# Altium PCB Universal_Driver v2.PcbDoc
Units mm, origin at the board's own origin, x right, y up, seen from the top; angles counter-clockwise.
Board outline 46.4 x 44.85 mm, 4 copper layers (Top Layer, Layer 2, Layer 3, Bottom Layer), stack 1.369 mm thick; 39 components, 42 nets, 175 pads, 29 vias.
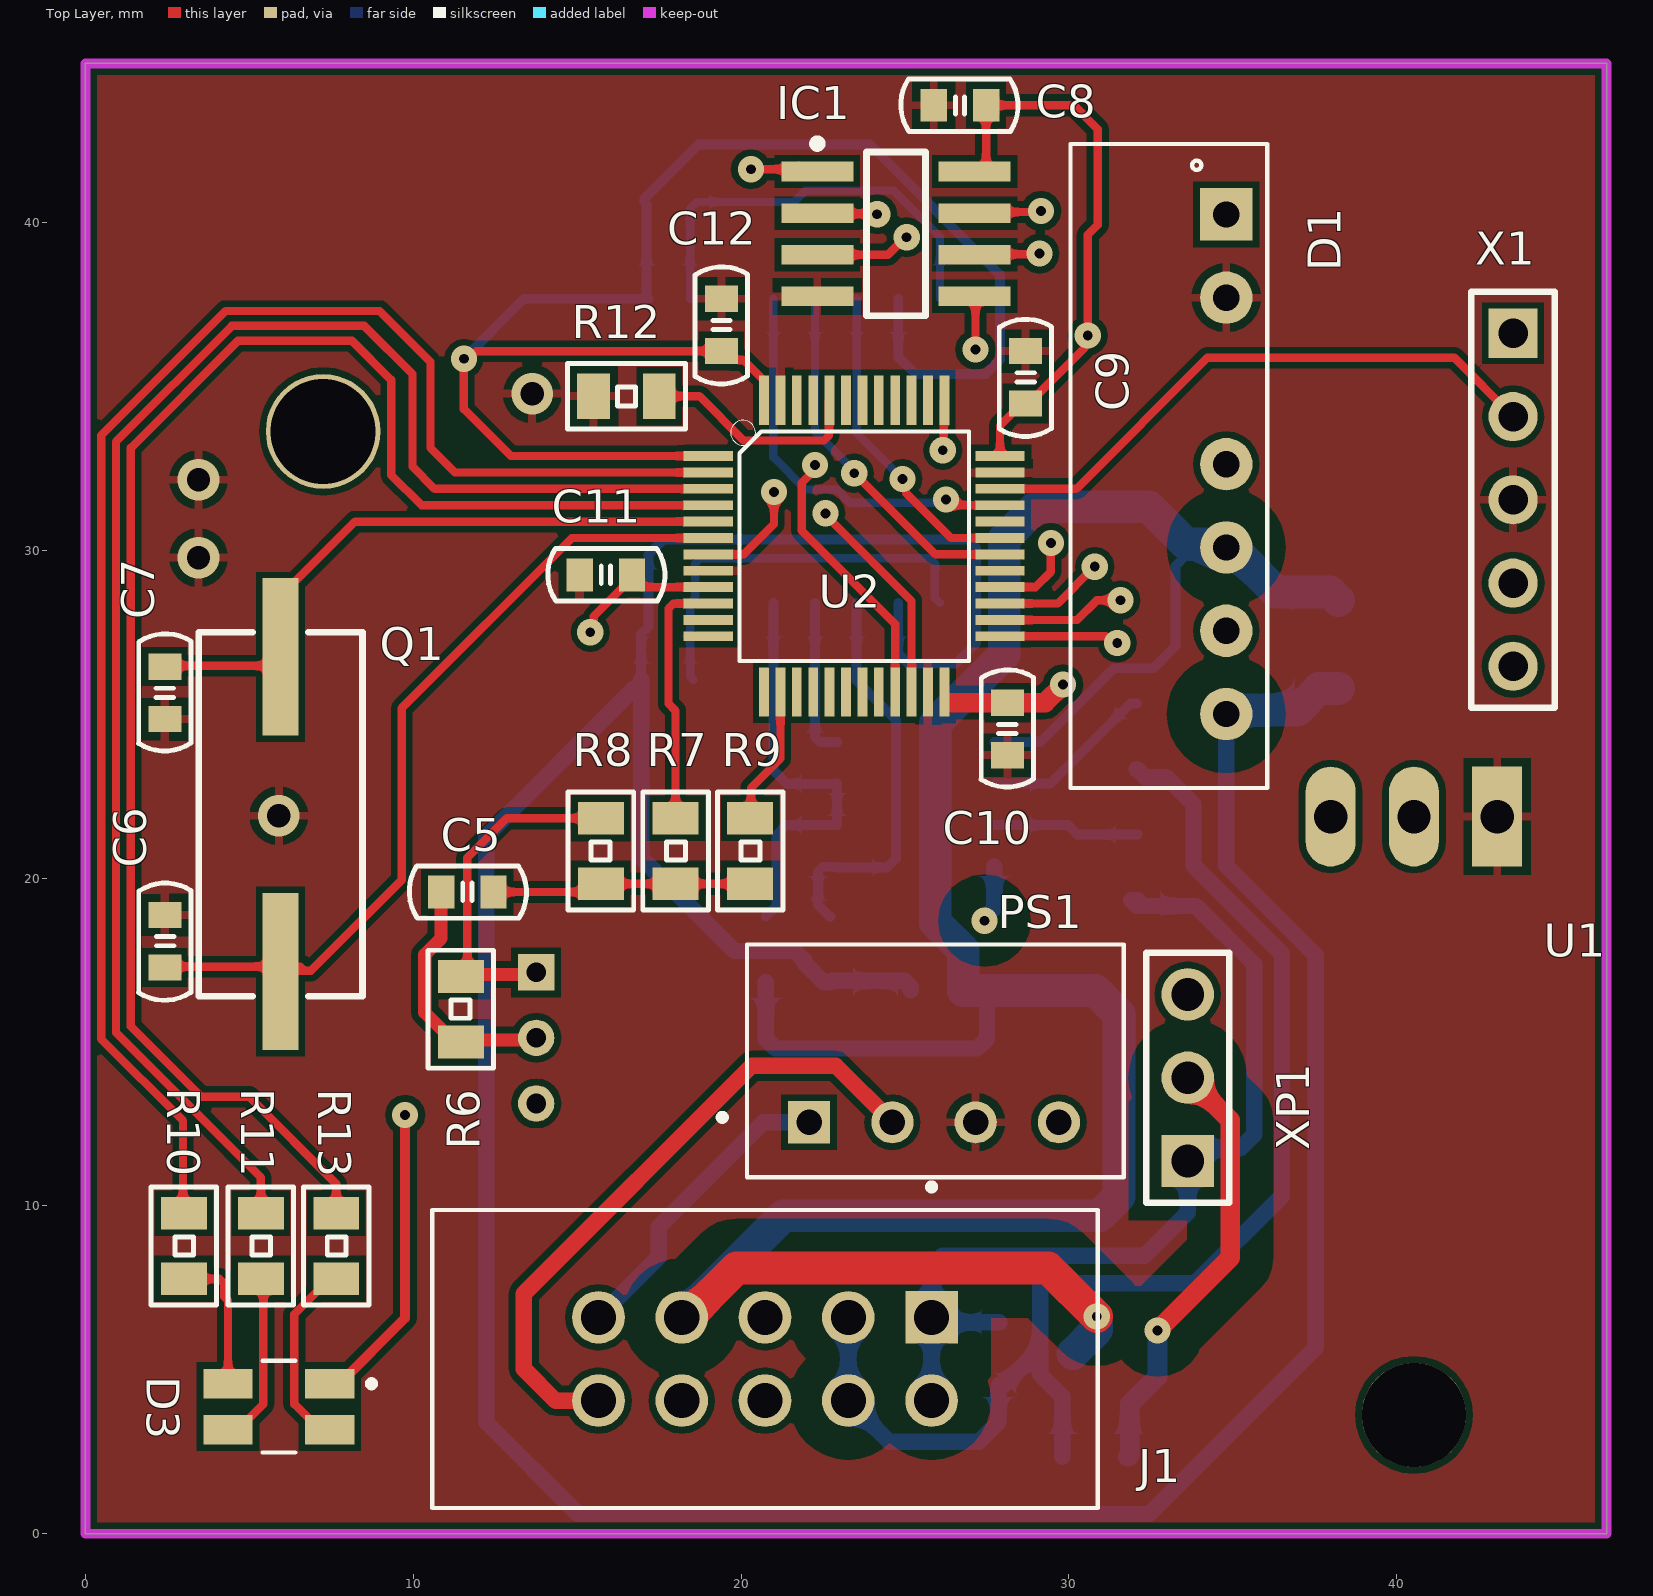
[diagram p0: Top Layer view]
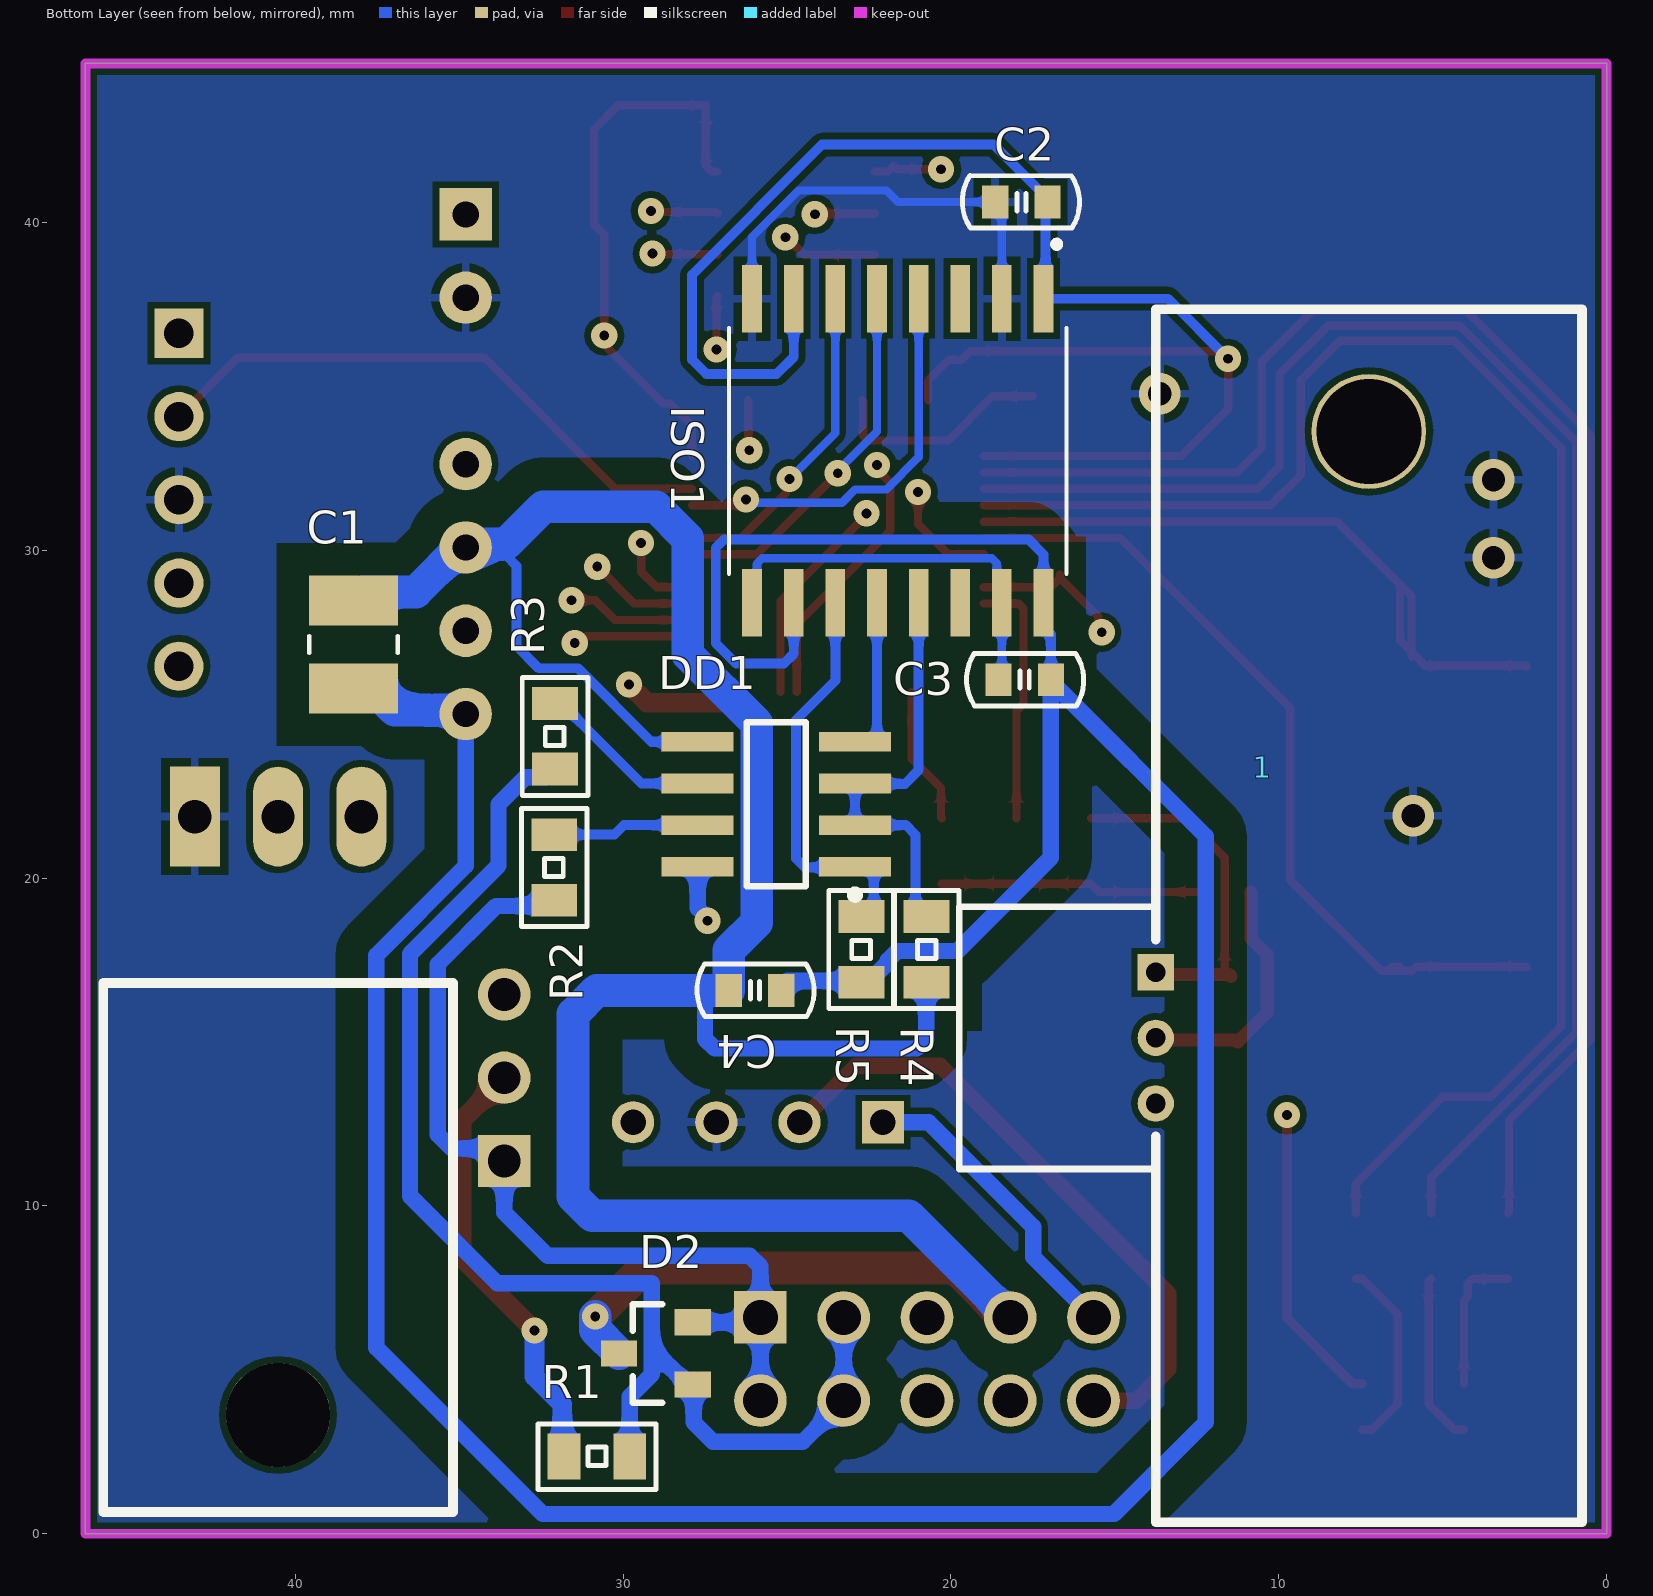
[diagram p1: Bottom Layer view, seen from below]
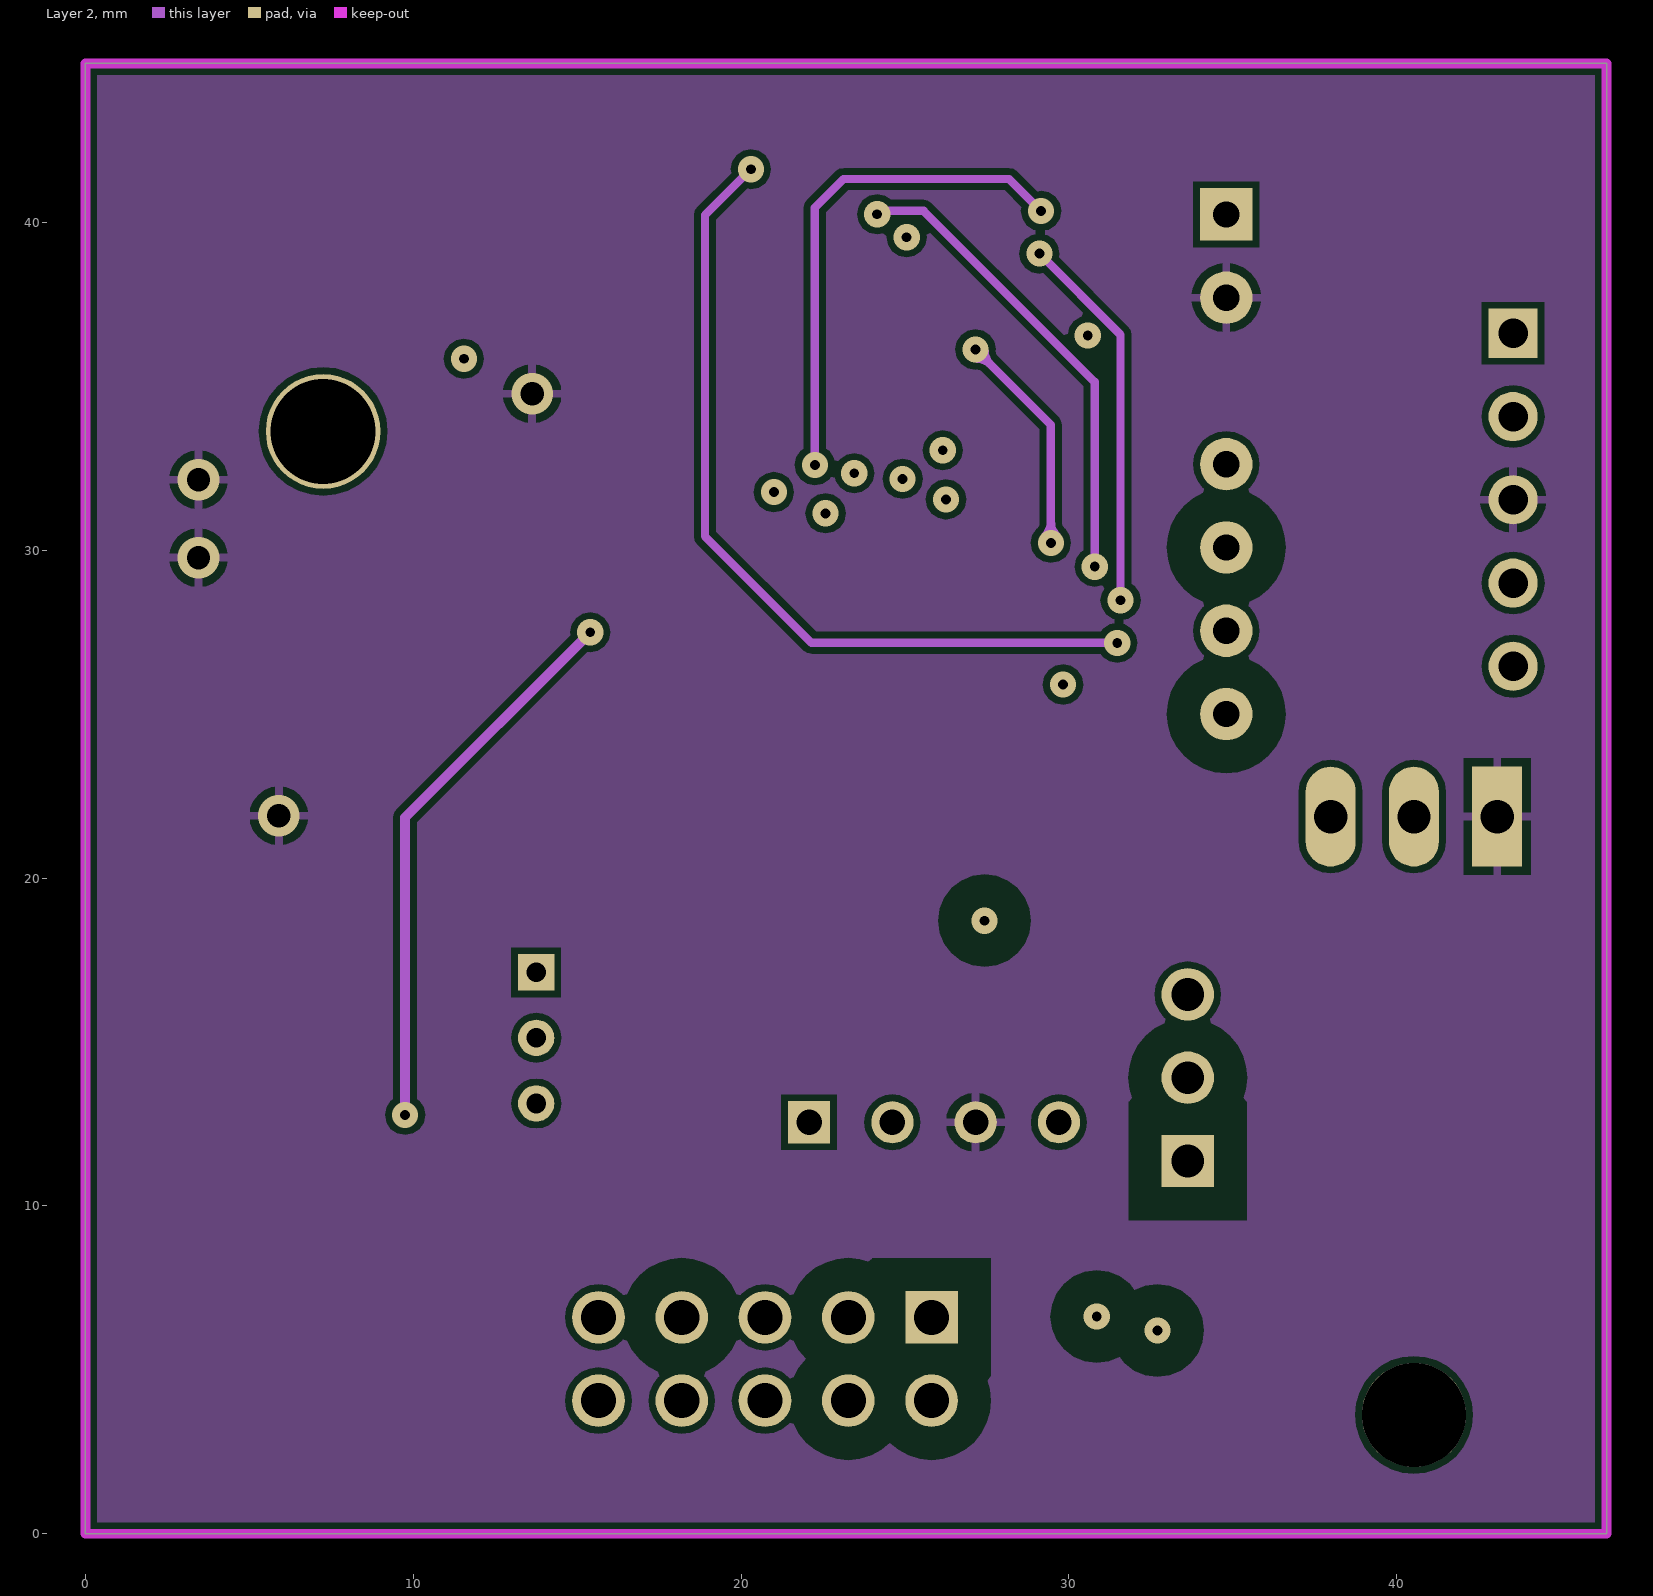
[diagram p2: Layer 2]
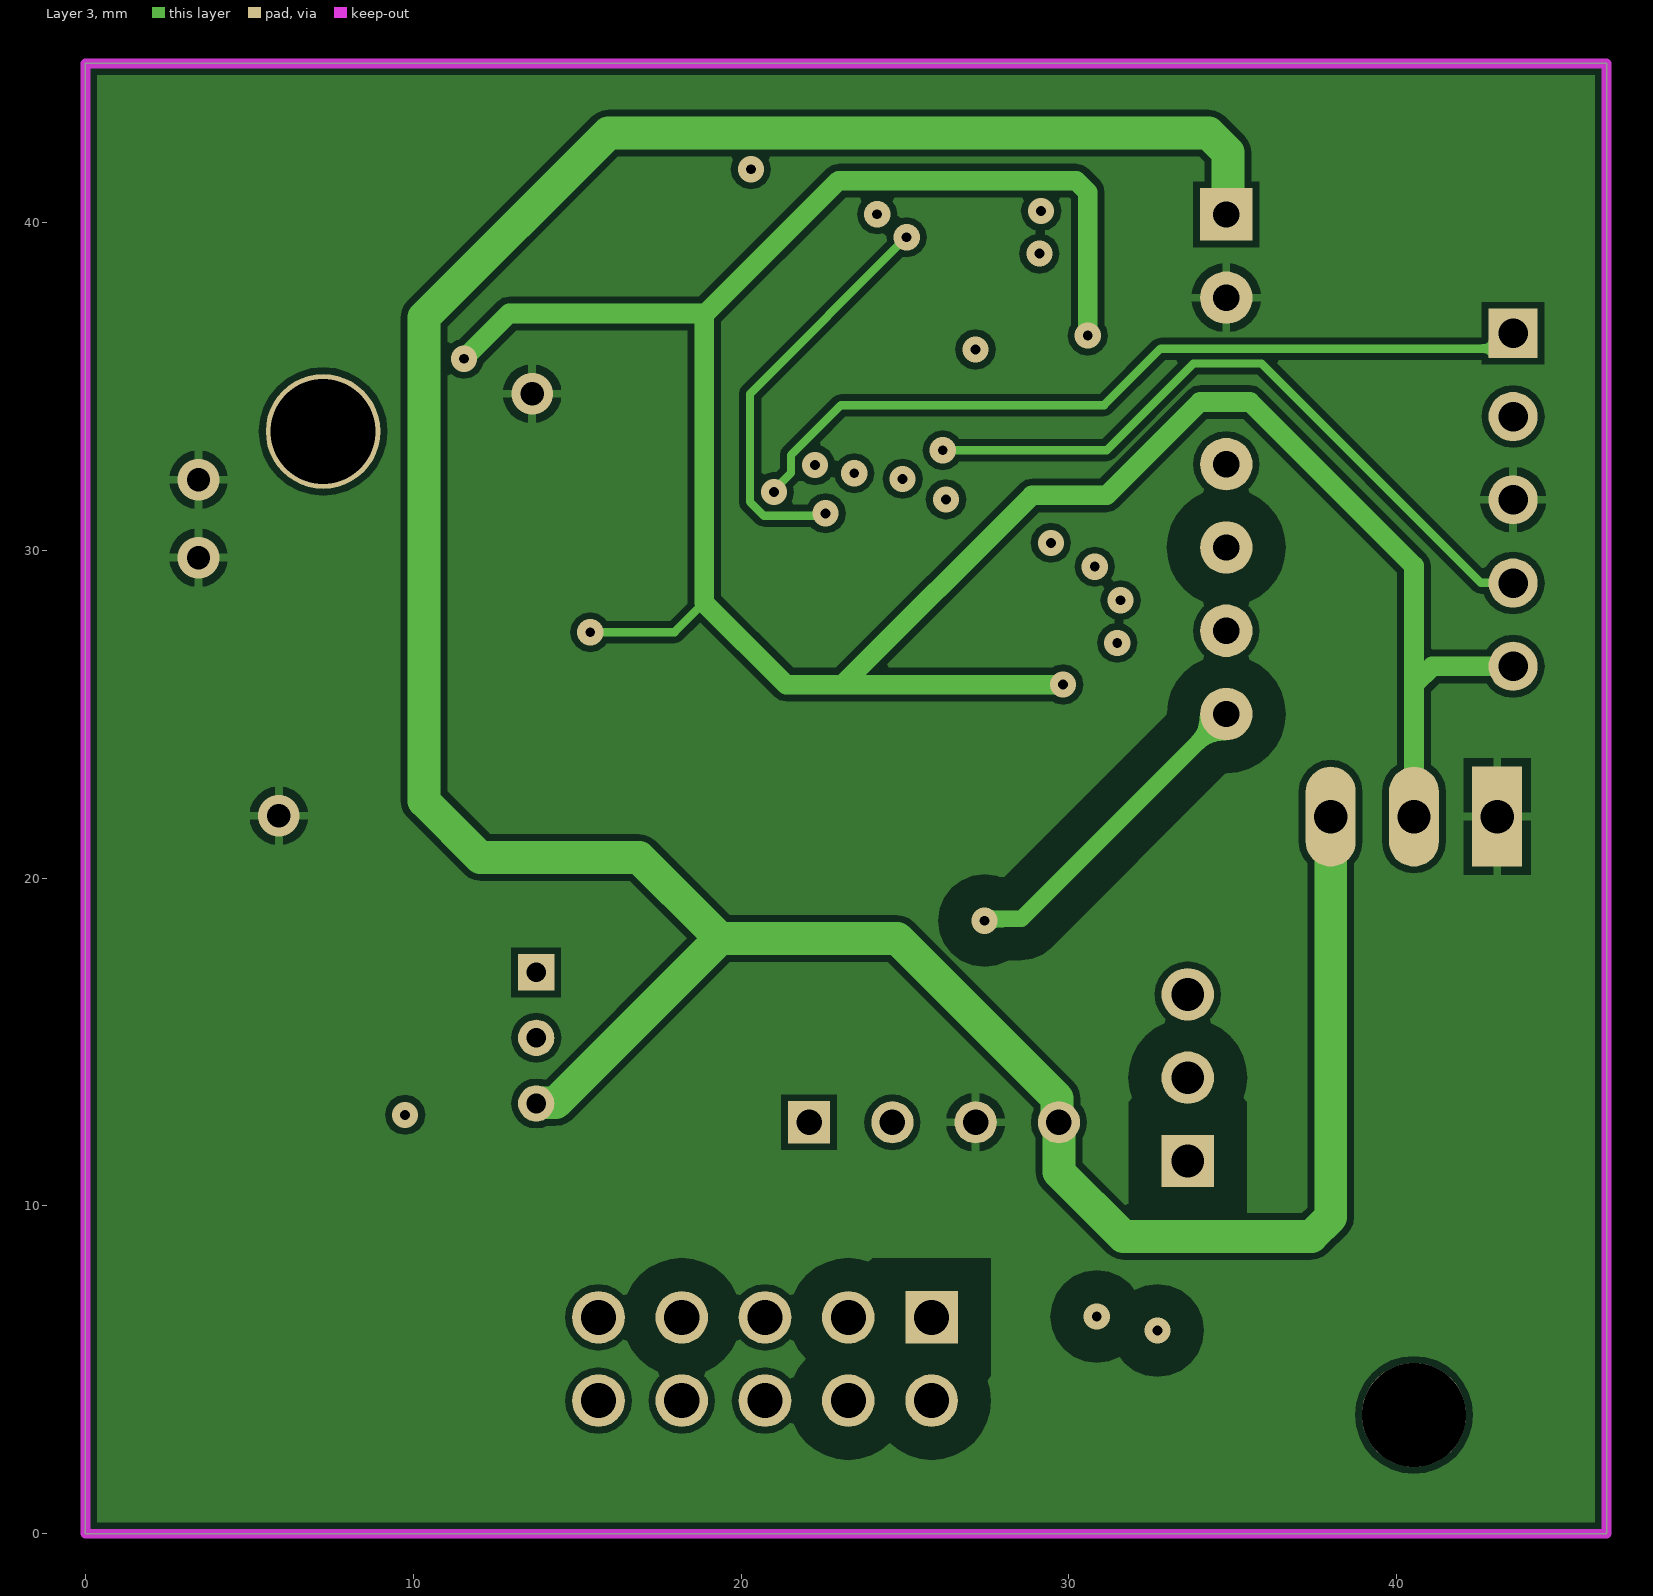
[diagram p3: Layer 3]

## Layer stack, top to bottom
Top Solder: solder mask 0.0254, SM-001, Dk 4
Top Layer: signal copper 0.035
Dielectric 1: prepreg 0.1295, PP-017, Dk 4.3
Dielectric 2: prepreg 0.1295, PP-017, Dk 4.3
Layer 2: signal copper 0.035
Dielectric 3: core 0.7112, Core-039, Dk 4.8
Layer 3: signal copper 0.035
Dielectric 4: prepreg 0.1295, PP-017, Dk 4.3
Dielectric 5: prepreg 0.1295, PP-017, Dk 4.3
Bottom Layer: signal copper 0.035
Bottom Solder: solder mask 0.0254, SM-001, Dk 4

## Board outline
0,0 0,44.85 46.4,44.85 46.4,0

## Design rules (kind name [scope] priority, off if disabled: settings)
Clearance Clearance_1 [InNetClass('ISO') vs InNet('GND')] p1: gap=1 ignorepadtopadclearanceinfootprint=FALSE
Clearance [All] p2: gap=0.2 ignorepadtopadclearanceinfootprint=FALSE
ComponentClearance [All] p1: gap=0.01 collisioncheckmode=3 verticalgap=0.01 showdistances=FALSE
DiffPairsRouting [All] p1: maxlimit=0.254 minlimit=0.2 mostfreqgap=0.254 toplayer_minwidth=0.25 toplayer_maxwidth=0.381 toplayer_prefwidth=0.381 midlayer1_minwidth=0.25 midlayer1_maxwidth=0.381 midlayer1_prefwidth=0.381 midlayer2_minwidth=0.25 midlayer2_maxwidth=0.381 midlayer2_prefwidth=0.381 bottomlayer_minwidth=0.25 bottomlayer_maxwidth=0.381 bottomlayer_prefwidth=0.381 maxuncoupledlength=12.7
HoleSize [All] p1: absolutevalues=TRUE maxlimit=5 minlimit=0.025 maxpercent=80.000 minpercent=20.000
MinimumSolderMaskSliver [All] p1: minsoldermaskwidth=0
PolygonConnect [All] p1: connectstyle=Relief reliefconductorwidth=0.254 reliefentries=4 polygonreliefangle="90 Angle" airgapwidth=0.254
RoutingVias [All] p1: holewidth=0.3 width=1 viastyle="Through Hole" minholewidth=0.3 minwidth=0 maxholewidth=1 maxwidth=4
SilkToSolderMaskClearance [IsPad] p1: minsilkscreentomaskgap=0.1 clearancetoexposedcopper=TRUE
SolderMaskExpansion [All] p1: expansion=0.102 istentingtop=FALSE
UnRoutedNet [All] p1: checkbadconnections=TRUE
Width [All] p1: maxlimit=4 minlimit=0.254 preferedwidth=0.254
24 further rules are at their usual default settings.

## Classes and differential pairs
net class ISO: 485_A 485_B +5v_ISO GND_ISO NetC3_1 NetDD1_1 NetDD1_2 NetDD1_4 NetDD1_6 NetDD1_7 NetISO1_14 NetR1_1 NetXP1_3

## Components (designator, comment, footprint, x,y, rotation, side; value= is the part's Value field where it differs from the comment)
1 "S3B-PH-K-S" S3B-PH-K-S 13.75,15.125 r270 bottom
C1 "10uF" CAPC3225X270N 38.225,27.125 r270 bottom
C2 "0.1uF" "CAPACITOR 0603" 17.05,40.625 r0 bottom
C3 "0.1uF" "CAPACITOR 0603" 18.55,26.05 r180 bottom
C4 "0.1uF" "CAPACITOR 0603" 26.775,16.575 r180 bottom
C5 "0.1uF" "CAPACITOR 0603" 10.85,19.575 r0 top
C6 "20pF" "CAPACITOR 0603" 2.425,18.875 r270 top
C7 "20pF" "CAPACITOR 0603" 2.425,24.85 r90 top
C8 "0.1uF" "CAPACITOR 0603" 27.475,43.575 r180 top
C9 "0.1uF" "CAPACITOR 0603" 28.675,36.075 r270 top
C10 "0.1uF" "CAPACITOR 0603" 28.125,23.75 r90 top
C11 "0.1uF" "CAPACITOR 0603" 15.075,29.25 r0 top
C12 "0.1uF" "CAPACITOR 0603" 19.4,37.675 r270 top
D1 "AM1DS-0505SJZ" AM2D-NZ 34.8,40.245 r270 top
D2 "SM712" SOT23 29,5.5 r0 bottom
D3 "150141M173100" LED_150141M173100 5.9,3.875 r0 top
DD1 "MAX485" NSO8 25.325,22.25 r0 bottom
IC1 "GD25Q16CTIGR" NSO8 24.725,39.65 r0 top
ISO1 "D?" *SOIC127P1030X265-16N 21.62,33.035 r270 bottom
J1 "DS1013-10SSIB1" CONNFLY_DS1013-10SSIB1 20.73,5.33 r180 top
PS1 "TME_2405S" CONV_TME_2405S 25.925,14.425 r0 top
Q1 "12MHz" HC49SM 5.95,21.95 r90 top
R1 "120" "Resistor 0805" 31.8,2.35 r180 bottom
R2 "10" "Resistor 0805" 32.1,19.325 r90 bottom
R3 "10" "Resistor 0805" 32.075,23.325 r90 bottom
R4 "10K" "Resistor 0805" 20.75,18.825 r270 bottom
R5 "10K" "Resistor 0805" 22.725,16.825 r90 bottom
R6 "10K" "Resistor 0805" 11.45,15 r90 top
R7 "10" "Resistor 0805" 18,21.825 r270 top
R8 "10K" "Resistor 0805" 15.725,19.825 r90 top
R9 "10" "Resistor 0805" 20.275,21.825 r270 top
R10 "3.9k" "Resistor 0805" 3,9.775 r270 top
R11 "3.9k" "Resistor 0805" 5.35,9.775 r270 top
R12 "510" "Resistor 0805" 17.5,34.7 r180 top
R13 "3.9k" "Resistor 0805" 7.65,9.775 r270 top
U1 "LM1117T-3.3" TO-220-KCS0003B 40.525,21.875 r180 top
U2 "STM32F303CBT7" LQFP48 23.45,30.125 r0 top
X1 "PLS-5" PLS-5-3D 43.55,36.62 r270 top
XP1 "PLS-3" ZL201-3 33.625,13.91 r90 top

## Footprints (in the part's own frame and the unit in brackets; to place one, negate y for a bottom-side part, rotate by r counter-clockwise, add the part's x,y. Pads: shape width x height; smd on the part's side, far side on the other; paste and mask are expansions set on the pad)
*SOIC127P1030X265-16N [mm]
  rect 2.06x0.6 smd: 1(-4.64,4.445) 2(-4.64,3.175) 3(-4.64,1.905) 4(-4.64,0.635) 5(-4.64,-0.635) 6(-4.64,-1.905) 7(-4.64,-3.175) 8(-4.64,-4.445) 9(4.64,-4.445) 10(4.64,-3.175) 11(4.64,-1.905) 12(4.64,-0.635) 13(4.64,0.635) 14(4.64,1.905) 15(4.64,3.175) 16(4.64,4.445)
  silkscreen extent -6.4,-5.15 3.75,5.15
AM2D-NZ [mm]
  rect 1.6x1.6 hole 0.8: 1(0,0)
  round 1.6 hole 0.8: 2(2.54,0) 4(7.62,0) 5(10.16,0) 6(12.7,0) 7(15.24,0)
  silkscreen extent -2.15,-4.75 17.5,1.25
"CAPACITOR 0603" [mm]
  rect 0.8x1 smd: 1(0,0) 2(1.6,0)
  silkscreen extent -0.97,-0.8 2.6,0.8, body extent -0.01,-0.38 1.64,0.42, height 0.81
CAPC3225X270N [mm]
  rect 1.53x2.72 smd: 1(-1.341,0) 2(1.341,0)
  silkscreen extent -0.26,-1.35 0.26,1.35
CONNFLY_DS1013-10SSIB1 [mm]
  rect 1.605x1.605 hole 1.07: 1(-5.08,-1.27)
  round 1.605 hole 1.07: 2(-5.08,1.27) 3(-2.54,-1.27) 4(-2.54,1.27) 5(0,-1.27) 6(0,1.27) 7(2.54,-1.27) 8(2.54,1.27) 9(5.08,-1.27) 10(5.08,1.27)
  silkscreen extent -10.15,-5.35 10.15,4.55
CONV_TME_2405S [mm]
  rect 1.288x1.288 hole 0.78: 1(-3.85,-1.875)
  round 1.288 hole 0.78: 2(-1.31,-1.875) 3(1.23,-1.875) 4(3.77,-1.875)
  silkscreen extent -6.6,-3.55 5.75,3.55, body extent -5.83,-3.51 5.57,2.49, height 10
HC49SM [mm] "Quartz crystal resonator"
  rect 4.8x1.1 smd mask+0.06: 1(-4.8,0) 2(4.8,0)
  silkscreen extent -5.55,-2.5 5.55,2.5, body extent -6.7,-2.45 6.7,2.45, height 5.09
LED_150141M173100 [mm]
  rect 1.5x0.9 smd: 1(1.55,0.7) 2(1.55,-0.7) 3(-1.55,0.7) 4(-1.55,-0.7)
  silkscreen extent -0.5,-1.4 2.93,1.4
LQFP48 [mm]
  rect 1.5x0.3 smd: 1(-4.45,2.75) 2(-4.45,2.25) 3(-4.45,1.75) 4(-4.45,1.25) 5(-4.45,0.75) 6(-4.45,0.25) 7(-4.45,-0.25) 8(-4.45,-0.75) 9(-4.45,-1.25) 10(-4.45,-1.75) 11(-4.45,-2.25) 12(-4.45,-2.75) 25(4.45,-2.75) 26(4.45,-2.25) 27(4.45,-1.75) 28(4.45,-1.25) 29(4.45,-0.75) 30(4.45,-0.25) 31(4.45,0.25) 32(4.45,0.75) 33(4.45,1.25) 34(4.45,1.75) 35(4.45,2.25) 36(4.45,2.75)
  rect 0.3x1.5 smd: 13(-2.75,-4.45) 14(-2.25,-4.45) 15(-1.75,-4.45) 16(-1.25,-4.45) 17(-0.75,-4.45) 18(-0.25,-4.45) 19(0.25,-4.45) 20(0.75,-4.45) 21(1.25,-4.45) 22(1.75,-4.45) 23(2.25,-4.45) 24(2.75,-4.45) 37(2.75,4.45) 38(2.25,4.45) 39(1.75,4.45) 40(1.25,4.45) 41(0.75,4.45) 42(0.25,4.45) 43(-0.25,4.45) 44(-0.75,4.45) 45(-1.25,4.45) 46(-1.75,4.45) 47(-2.25,4.45) 48(-2.75,4.45)
  silkscreen extent -3.77,-3.5 3.5,3.84
NSO8 [mm] "SOIC, 8-Leads, Body 4.9x3.9mm, Pitch 1.27mm"
  rect 2.2x0.6 smd mask+0.06: 1(-2.4,1.905) 2(-2.4,0.635) 3(-2.4,-0.635) 4(-2.4,-1.905) 5(2.4,-1.905) 6(2.4,-0.635) 7(2.4,0.635) 8(2.4,1.905)
  silkscreen extent -2.52,-2.5 0.9,2.88, body extent -3,-2.45 3,2.45, height 1.7
PLS-5-3D [mm] "Connector; Header; 5 Position"
  rect 1.5x1.5 hole 0.9: 1(0,0)
  round 1.5 hole 0.9: 2(2.54,0) 3(5.08,0) 4(7.62,0) 5(10.16,0)
  silkscreen extent -1.27,-1.27 11.43,1.27, body extent -1.27,-1.27 11.43,1.27, height 8.44
"Resistor 0805" [mm]
  rect 1x1.4 smd: 1(0,0) 2(2,0)
  silkscreen extent -0.8,-1 2.8,1, body extent -0.03,-0.65 2.02,0.65, height 0.41
S3B-PH-K-S [mm]
  rect 1.108x1.108 hole 0.6: 1(-2,0)
  round 1.108 hole 0.6: 2(0,0) 3(2,0)
  round 3.5 hole 3.2: ""(-18.5,6.5)
  silkscreen extent -22.23,-6 14.77,13, body extent -22.23,-6.22 22.27,13.08, height 21.7
SOT23 [mm] "SOT23, 3-Leads, Body 2.9x1.3mm, Pitch 0.95mm"
  rect 1.1x0.8 smd mask+0.06: 1(-1.125,0.95) 2(-1.125,-0.95) 3(1.125,0)
  silkscreen extent -0.2,-1.5 0.7,1.5, body extent -1.32,-1.5 1.32,1.5, height 1.08
TO-220-KCS0003B [mil]
  rect 60x120 hole 40: 1(-100,0)
  oval 60x120 hole 40: 2(0,0) 3(100,0)
  round 125 hole 125 unplated: ""(0,718.5)
  body extent -190,-97 200,827
ZL201-3 [mm] "Connector; PLS-3; pitch 2.54"
  rect 1.6x1.6 hole 1 mask+0.06: 1(-2.54,0)
  round 1.6 hole 1 mask+0.06: 2(0,0) 3(2.54,0)
  silkscreen extent -3.81,-1.27 3.81,1.27, body extent -3.81,-1.27 3.81,1.27, height 8.44

## Part data
1: "Connector Header Through Hole, Right Angle 3 position 0.079 (2.00mm)", Package=None, Availability=Bad, Check_prices=https://www.snapeda.com/parts/S3B-PH-K-S/JST%20Sales%20America%20Inc./view-part/618944/?ref=eda, MF="JST Sales", MP=S3B-PH-K-S, Price=None, SnapEDA_Link=https://www.snapeda.com/parts/S3B-PH-K-S/JST%20Sales%20America%20Inc./view-part/618944/?ref=snap
C1 C2 C3 C4 C5 C6 C7 C8 C9 C10 C11 C12: library part Capasitor
D2: "Asymmetrical TVS Diode for Extended Common-Mode RS-485"
D3: "Red, Green, Blue _RGB_ 625nm Red, 520nm Green, 470nm Blue LED Indication - Discrete 2V Red, 3.2V Green, 3.2V Blue 1411 _3528 Metric_", Package="1411 WÃ¼rth Elektronik", Availability=Unavailable, MF="Wurth Electronics", MP=150141M173100, Price=None, SnapEDA_Link=https://www.snapeda.com/parts/150141M173100/Wurth%20Electronics%20Inc./view-part/281733/?ref=snap
DD1: "Low-Power, Slew-Rate-Limited RS-485/RS-422 Transceiver", ComponentLink1URL=http://pdfserv.maxim-ic.com/en/ds/MAX1487-MAX491.pdf, Type=MAX485
IC1: library part W25Q128FVEIG, "128M-bit Serial Flash Memory with uniform 4KB sectors and Dual/Quad SPI and QPI"
ISO1: library part ISO7341
J1: "Socket; IDC; male; PIN: 10; straight; THT; gold plated; 2.54mm", Package=None, Availability=Unavailable, BuyPart=https://www.snapeda.com/parts/DS1013-10SSIB1/Connfly/view-part/951223/?ref=eda, MF=Connfly, MP=DS1013-10SSIB1, Price=None, SnapEDA_Link=https://www.snapeda.com/parts/DS1013-10SSIB1/Connfly/view-part/951223/?ref=snap
PS1: "1 Watt DC/DC converter, industrial, 10% input, unregulated, encapsulated, SIP-4 package", Package="SIP-4 Traco Power", Availability="In Stock", Check_prices=https://www.snapeda.com/parts/TME%202405S/Traco%20Power/view-part/488335/?ref=eda, MF="Traco Power", MP="TME 2405S", Price=None, SnapEDA_Link=https://www.snapeda.com/parts/TME%202405S/Traco%20Power/view-part/488335/?ref=snap
Q1: library part "Quartz Crystal", "Quartz Crystal"
R1 R2 R3 R4 R5 R6 R7 R8 R9 R10 R11 R12 R13: library part Resistor
U1: "Linear Voltage Regulator IC 1 Output 800mA TO-220-3", Package="TO-220 Texas Instruments", Availability=Unavailable, MF="Texas Instruments", MP=LM1117T-3.3, Price=None, SnapEDA_Link=https://www.snapeda.com/parts/LM1117T-3.3/Texas%20Instruments/view-part/103788/?ref=snap
U2: "ARMÂ® CortexÂ®-M4 STM32F3 Microcontroller IC 32-Bit 72MHz 128KB _128K x 8_ FLASH 48-LQFP _7x7_", Package="LQFP-48 STMicroelectronics", Availability=Unavailable, MF=STMicroelectronics, MP=STM32F303CBT7, Price=None, SnapEDA_Link=https://www.snapeda.com/parts/STM32F303CBT7/STMicroelectronics/view-part/560080/?ref=snap
X1: "Header, 5-Pin", LatestRevisionDate=17-Jul-2002, LatestRevisionNote="Re-released for DXP Platform.", Publisher="Altium Limited"
XP1: library part "Select jump", "Connector, 3-Pin", Class="Электронные компоненты", Installation=DIP, Ordering_Information={Ordering_Information}, Pins=3, Pitch_mm={Pitch_mm}, SubClass=Разъемы, Type_of_connector={Type_of_connector}

## Via types
v1: diameter 0.8, hole 0.3, Top Layer to Bottom Layer, tented both sides, 25 vias
v2: diameter 1.27, hole 0.711, Top Layer to Bottom Layer, tented both sides, 4 vias

## Nets (pads, with @x,y where several pads share a name; then routed paths per layer and width w, separated by ;. In a path a pad name is that pad's centre, name@x,y a point inside that pad or via, vN(x,y) a via of type N, cw(c..) or ccw(c..) an arc to the next point about the centre after c; other vN are vias at no path point)
485_A: D2.1 J1.3 J1.4 R1.2 R3.1 | length 39.9
  Bottom Layer w0.5: J1.3 J1.4 24.522,2.808 27.258,2.808 27.85,3.4 27.85,4.4 27.875,4.425 D2.1 ; D2.1@28.025,4.55 29.125,5.65 ; R1.2 29.8,4.185 29.125,4.86 29.125,5.65 ; R3.1 32.325,23.075 32.975,23.075 33.8,22.25 33.8,20.385 36.5,17.685 36.5,10.3 33.842,7.642 29.125,7.642 29.125,5.65
485_B: D2.2 J1.1 J1.2 R2.1 XP1.1 | length 28.6
  Bottom Layer w0.5: J1.2 J1.1 ; D2.2 25.96,6.45 J1.1 ; R2.1 31.9,19.325 32.075,19.15 33.875,19.15 35.65,17.375 35.65,12.175 35.225,11.75 34.005,11.75 XP1.1 33.625,9.8 32.3,8.475 26.133,8.475 25.81,8.152 J1.1
+3.3v: C2.1 C8.1 C9.2 C10.2 C11.2 C12.2 D3.1 IC1.8 ISO1.1 ISO1.7 U1.2 U2.1 U2.9 U2.24 U2.36 U2.48 X1.5 | length 186.9
  Top Layer w0.254: v1(11.544,35.844) 11.544,34.306 12.975,32.875 U2.1 ; v1@11.617,35.77 11.923,36.075 C12.2 19.673,35.802 20.073,35.802 20.7,35.175 U2.48 ; v1(15.4,27.5) 15.504,27.604 15.504,27.979 C11.2@16.675,29.15 ; C11.2 C11.2@16.675,29.15 ; U2.9 16.95,28.875 C11.2@16.675,29.15 ; IC1.8 27.302,41.555 27.475,41.728 C8.1 30.15,43.575 30.875,42.85 30.875,39.924 30.573,39.622 v1(30.573,36.548) 30.469,36.444 30.469,36.169 28.775,34.475 C9.2 28.575,34.475 27.9,33.8 U2.36
  Top Layer w0.3: D3.1 7.75,4.575 9.75,6.575 v1(9.75,12.775)
  Top Layer w0.6: 26.35,25.35 C10.2 29.275,25.35 29.82,25.895 v1(29.82,25.905)
  Layer 2 w0.3: v1(9.75,12.775) 9.75,21.85 v1(15.4,27.5)
  Layer 3 w0.254: v1(15.4,27.5) 17.975,27.5 18.875,28.4
  Layer 3 w0.6: v1(11.544,35.844) 12.925,37.225 18.925,37.225 ; v1(29.82,25.905) 29.814,25.9 23.1,25.9 ; v1(30.573,36.548) 30.573,40.924 30.222,41.275 22.975,41.275 18.875,37.175 18.875,28.4 21.375,25.9 23.1,25.9 ; U1.2 40.525,25.9 ; X1.5 41.085,26.46 40.525,25.9 ; 23.1,25.9 28.875,31.675 31.15,31.675 34,34.525 35.525,34.525 40.525,29.525 40.525,25.9
  Bottom Layer w0.3: v1(11.544,35.844) 13.375,37.675 ISO1.1 17.113,37.737 17.113,40.562 C2.1 17.05,40.725 18.7,42.375 23.928,42.375 27.9,38.403 27.9,35.814 27.461,35.375 25.318,35.375 24.795,35.898 ISO1.7
+5v: 1.3 D1.1 PS1.4 U1.3 | length 98.4
  Layer 3 w1: 1.3 13.771,13.146 14.346,13.146 19.36,18.16 ; D1.1 34.8,40.495 34.85,40.545 34.85,42.139 34.264,42.725 15.944,42.725 10.325,37.106 10.325,22.35 12.05,20.625 16.895,20.625 19.073,18.447 19.36,18.16 ; U1.3 37.985,9.656 37.399,9.07 31.655,9.07 29.695,11.03 PS1.4 29.64,12.605 29.64,13.285 24.765,18.16 19.36,18.16
+5v_ISO: C1.2 C3.2 C4.2 D1.7 DD1.8 ISO1.10 ISO1.16 R5.1 | length 125.8
  Layer 3 w0.5: v1(27.425,18.7) 27.482,18.757 28.552,18.757 D1.7
  Bottom Layer w0.3: C3.2 16.95,27.44 17.175,27.665 ISO1.16 17.175,29.875 17.625,30.325 26.925,30.325 27.175,30.075 27.175,27.175 26.55,26.55 25.088,26.55 24.795,26.843 ISO1.10
  Bottom Layer w0.5: C3.2@16.95,25.8 16.95,20.625 19.8,17.775 21.636,17.775 21.921,17.49 21.921,17.429 22.525,16.825 R5.1 22.763,16.863 24.988,16.863 25.175,16.675 C4.2 ; C3.2 16.95,25.95 16.8,25.8 16.75,25.8 12.225,21.275 12.225,3.4 15.025,0.6 32.45,0.6 37.525,5.675 37.525,17.65 34.8,20.375 D1.7 ; v1(27.425,18.7) 27.425,18.781 27.725,19.081 DD1.8
  Bottom Layer w1: D1.7 34.915,25.12 36.966,25.12 37.63,25.784 C1.2
AGND: 1.2 C5.1 R6.1 | length 7.7
  Top Layer w0.4: C5.1 10.85,18.166 10.35,17.666 10.35,15.9 11.25,15 11.313,15.062 13.688,15.062 1.2
B: R13.1 U2.4 | length 49.5
  Top Layer w0.254: R13.1 7.65,10.675 5,13.325 3.534,13.325 1.385,15.474 1.385,33.126 4.651,36.392 8.133,36.392 9.327,35.198 9.327,32.298 10.25,31.375 U2.4
DE: ISO1.4 U2.33 | length 12.4
  Top Layer w0.254: v1(26.25,31.55) 26.398,31.55 26.573,31.375 U2.33
  Bottom Layer w0.254: ISO1.4 20.985,32.84 21.971,31.854 22.921,31.854 23.325,31.45 26.15,31.45 v1(26.25,31.55)
G: R11.1 U2.3 | length 48.6
  Top Layer w0.254: R11.1 5.35,10.867 0.931,15.286 0.931,33.314 4.463,36.846 8.504,36.846 9.975,35.375 9.975,32.55 10.65,31.875 U2.3
GND: C2.2 C6.1 C7.1 C8.2 C9.1 C10.1 C11.1 C12.1 D1.2 IC1.4 ISO1.2 ISO1.8 PS1.3 R12.2 U1.1 U2.8 U2.23 U2.35 U2.47 X1.3 | length 13.1
  Bottom Layer w0.254: ISO1.2 18.445,40.42 C2.2 21.611,40.625 21.963,40.977 24.651,40.977 26.065,39.563 ISO1.8
  other v2: 5.9,21.9 3.45,29.775 3.45,32.15 13.625,34.775
GND_ISO: C1.1 C4.1 D1.5 D2.3 DD1.5 J1.7 R4.2 | length 88.8
  Top Layer w1: J1.7 18.354,6.6 19.856,8.103 29.372,8.103 v1(30.85,6.625)
  Bottom Layer w0.3: DD1.5 29.13,24.155 31.375,26.4 32.575,26.4 33.25,27.075 33.25,29.525 33.561,29.836 34.551,29.836 D1.5
  Bottom Layer w0.5: R4.2 20.757,16.818 20.757,15.093 21.05,14.8 27.207,14.8 27.5,15.093 27.5,16.55 27.475,16.575
  Bottom Layer w1: J1.7 21.288,9.698 30.939,9.698 31.525,10.283 31.525,15.85 30.8,16.575 27.475,16.575 C4.1 26.775,17.794 25.925,18.644 25.925,24.723 28.025,26.823 28.025,30.356 28.994,31.325 32.436,31.325 33.561,30.2 34.685,30.2 D1.5 34.962,30.085 36.316,28.731 37.96,28.731 C1.1 ; D2.3 30.85,6.225 v1(30.85,6.625)
Net1_1: 1.1 R6.2 R8.2 | length 10.5
  Top Layer w0.254: R6.2@11.513,17.063 11.65,17.2 11.65,20.625 12.85,21.825 R8.2
  Top Layer w0.4: R6.2 11.513,17.063 13.688,17.063 1.1
NetC3_1: C3.1 ISO1.9 ISO1.15 | length 12.4
  Bottom Layer w0.254: C3.1 18.445,26.155 ISO1.15 18.6,28.55 18.6,29.601 18.75,29.752 25.76,29.752 25.91,29.601 25.91,28.55 ISO1.9
NetC5_2: C5.2 R7.2 R8.1 R9.2 | length 7.9
  Top Layer w0.254: C5.2 15.475,19.575 R8.1 R7.2 R9.2
NetC6_2: C6.2 Q1.1 U2.6 | length 25.6
  Top Layer w0.254: C6.2 2.45,17.3 5.8,17.3 Q1.1 5.975,17.175 6.3,17.175 6.55,17.175 6.881,17.175 9.648,19.942 9.648,25.185 14.838,30.375 U2.6 ; Q1.1@6.3,17.3 6.55,17.3 6.675,17.175
NetC7_2: C7.2 Q1.2 U2.5 | length 21.7
  Top Layer w0.254: C7.2 2.45,26.475 5.527,26.475 6.3,27.248 Q1.2@6.3,28.95 ; Q1.2 5.95,28.6 Q1.2@6.3,28.95 ; U2.5 8.225,30.875 Q1.2@6.3,28.95
NetD3_2: D3.2 R13.2 | length 5.9
  Top Layer w0.254: D3.2 7.15,3.175 6.373,3.952 6.373,6.698 7.45,7.775 R13.2
NetD3_3: D3.3 R10.2 | length 4.4
  Top Layer w0.254: R10.2 4.081,7.775 4.23,7.626 4.23,7.233 4.35,7.113 D3.3
NetD3_4: D3.4 R11.2 | length 5.3
  Top Layer w0.254: D3.4 4.65,3.175 5.427,3.952 5.427,7.698 R11.2
NetDD1_1: DD1.1 ISO1.11 R5.2 | length 12.4
  Bottom Layer w0.3: R5.2 22.7,18.825 22.35,19.175 22.35,20.195 22.5,20.345 DD1.1 22.945,20.325 24.45,20.325 24.725,20.6 24.725,24.825 23.525,26.025 ISO1.11
NetDD1_2: DD1.2 DD1.3 ISO1.13 R4.1 | length 13.1
  Bottom Layer w0.3: R4.1 21.078,19.153 21.078,21.318 21.375,21.615 DD1.2 DD1.3 22.915,22.875 21.4,22.875 20.985,23.29 ISO1.13
NetDD1_4: DD1.4 ISO1.12 | length 4.8
  Bottom Layer w0.3: ISO1.12 22.255,24.305 22.405,24.155 DD1.4
NetDD1_6: DD1.6 R3.2 | length 5.4
  Bottom Layer w0.3: DD1.6 29.435,22.885 31.875,25.325 R3.2
NetDD1_7: DD1.7 R2.2 | length 4.5
  Bottom Layer w0.3: DD1.7 29.967,21.615 30.257,21.325 R2.2
NetIC1_1: IC1.1 U2.25 | length 31.5
  Top Layer w0.254: v1(20.3,41.625) 21.645,41.625 21.748,41.728 21.921,41.555 IC1.1 ; U2.25 31.127,27.375 31.327,27.175 v1(31.475,27.175)
  Layer 2 w0.254: v1(20.3,41.625) 18.9,40.225 18.9,30.425 22.15,27.175 v1(31.475,27.175)
NetIC1_2: IC1.2 U2.27 | length 19.7
  Top Layer w0.254: IC1.2 22.343,40.267 24.133,40.267 v1(24.15,40.25) ; U2.27 29.663,28.375 v1(30.788,29.5)
  Layer 2 w0.254: v1(24.15,40.25) 24.254,40.354 25.571,40.354 30.788,35.137 v1(30.788,29.5)
NetIC1_3: IC1.3 U2.22 | length 22
  Top Layer w0.254: IC1.3 24.481,39.015 25.016,39.55 v1(25.05,39.55) ; v1(22.576,31.127) 22.576,31.079 25.2,28.455 U2.22
  Layer 3 w0.254: v1(22.576,31.127) 22.499,31.05 20.7,31.05 20.274,31.475 20.274,34.774 v1(25.05,39.55)
NetIC1_5: IC1.5 U2.28 | length 11.1
  Top Layer w0.254: IC1.5 27.15,37.72 v1(27.15,36.125) ; U2.28 28.98,28.875 29.45,29.345 v1(29.45,30.225)
  Layer 2 w0.254: v1(27.15,36.125) 29.45,33.825 v1(29.45,30.225)
NetIC1_6: IC1.6 U2.26 | length 17.5
  Top Layer w0.254: IC1.6 27.143,39.033 29.082,39.033 v1(29.1,39.05) ; U2.26 30.25,27.875 30.85,28.475 v1(31.575,28.475)
  Layer 2 w0.254: v1(29.1,39.05) 31.575,36.575 v1(31.575,28.475)
NetIC1_7: IC1.7 U2.21 | length 25.8
  Top Layer w0.254: v1(22.251,32.602) 22.251,32.454 21.849,32.052 21.849,30.6 24.7,27.749 U2.21 ; IC1.7 27.157,40.317 29.117,40.317 v1(29.15,40.35)
  Layer 2 w0.254: v1(22.251,32.602) 22.251,40.451 23.125,41.325 28.175,41.325 v1(29.15,40.35)
NetISO1_5: ISO1.5 U2.30 | length 11.3
  Top Layer w0.254: v1(23.451,32.352) 25.928,29.875 U2.30
  Bottom Layer w0.254: ISO1.5 22.255,33.626 23.451,32.43 v1(23.451,32.352)
NetISO1_6: ISO1.6 U2.31 | length 10
  Top Layer w0.254: v1(24.926,32.177) 25.031,32.072 25.031,31.741 26.397,30.375 U2.31
  Bottom Layer w0.254: ISO1.6 23.525,33.578 v1(24.926,32.177)
NetJ1_9: J1.9 PS1.1 | length 9.4
  Bottom Layer w0.5: J1.9 17.49,8.44 17.49,9.359 20.681,12.55 PS1.1
NetJ1_10: J1.10 PS1.2 | length 19.8
  Top Layer w0.5: J1.10 14.34,4.06 13.375,5.025 13.375,7.325 20.325,14.275 22.89,14.275 PS1.2
NetR1_1: R1.1 XP1.2 | length 13.4
  Top Layer w0.6: v1(32.7,6.2) 34.925,8.425 34.925,12.61 XP1.2
  Bottom Layer w0.6: R1.1 31.852,2.402 31.852,3.95 32.7,4.798 v1(32.7,6.2)
NetR7_1: R7.1 U2.10 | length 7.8
  Top Layer w0.254: R7.1 18,25.104 17.784,25.32 17.784,28.226 17.933,28.375 U2.10
NetR9_1: R9.1 U2.14 | length 4.2
  Top Layer w0.254: R9.1 20.3,21.85 20.3,22.75 21.2,23.65 U2.14
NetR12_1: R12.1 U2.44 | length 6.9
  Top Layer w0.254: R12.1 18.725,34.7 20.075,33.35 22.526,33.35 22.677,33.501 22.677,34.552 U2.44
NetU2_34: U2.34 X1.2 | length 18.1
  Top Layer w0.254: U2.34 30.225,31.875 34.225,35.875 41.755,35.875 X1.2
NetU2_37: U2.37 X1.4 | length 22.8
  Top Layer w0.254: v1(26.15,33.05) 26.177,33.077 26.177,34.552 U2.37
  Layer 3 w0.254: v1(26.15,33.05) 31.15,33.05 33.796,35.696 35.879,35.696 42.568,29.007 43.543,29.007 X1.4
R: R10.1 U2.2 | length 48.4
  Top Layer w0.254: R10.1 2.975,9.8 2.975,12.6 0.477,15.098 0.477,33.502 4.275,37.3 8.975,37.3 10.525,35.75 10.525,33.125 11.275,32.375 U2.2
RESET: U2.7 X1.1 | length 28.3
  Top Layer w0.254: U2.7 20.08,29.875 21.001,30.796 v1(21.001,31.777)
  Layer 3 w0.254: v1(21.001,31.777) 21.001,31.835 21.524,32.358 21.524,32.903 23.046,34.425 31.075,34.425 32.8,36.15 43.08,36.15 X1.1
pads on no net: 1. D1.4 D1.6 ISO1.3 ISO1.14 J1.5 J1.6 J1.8 U1. U2.11 U2.12 U2.13 U2.15 U2.16 U2.17 U2.18 U2.19 U2.20 U2.29 U2.32 U2.38 U2.39 U2.40 U2.41 U2.42 U2.43 U2.45 U2.46 XP1.3

## Polygon pours and split planes (outlines as drawn)
GND on Layer 2 "GND" (solid, remove dead copper, pour order 1): 0,44.85 46.4,44.85 46.4,0 0,0
GND on Bottom Layer "GND" (solid, remove dead copper, pour order 6): 0,44.85 46.4,44.85 46.4,0 0,0
GND on Top Layer "GND_L01_P003" (solid, remove dead copper, pour order 3): 0,44.85 46.4,44.85 46.4,0 0,0
GND on Layer 3 "GND" (solid, remove dead copper, pour order 2): 0,44.85 46.4,44.85 46.4,0 0,0

## Keep-outs
Keep-Out Layer:
  the board outline again, w0.3